# Altium PCB PCB1.PcbDoc
Units mil, origin at the board's own origin, x right, y up, seen from the top; angles counter-clockwise.
Board outline 6624.2 x 3240.03 mil, 2 copper layers (Top Layer, Bottom Layer); 35 components, 65 nets, 242 pads, 0 vias.
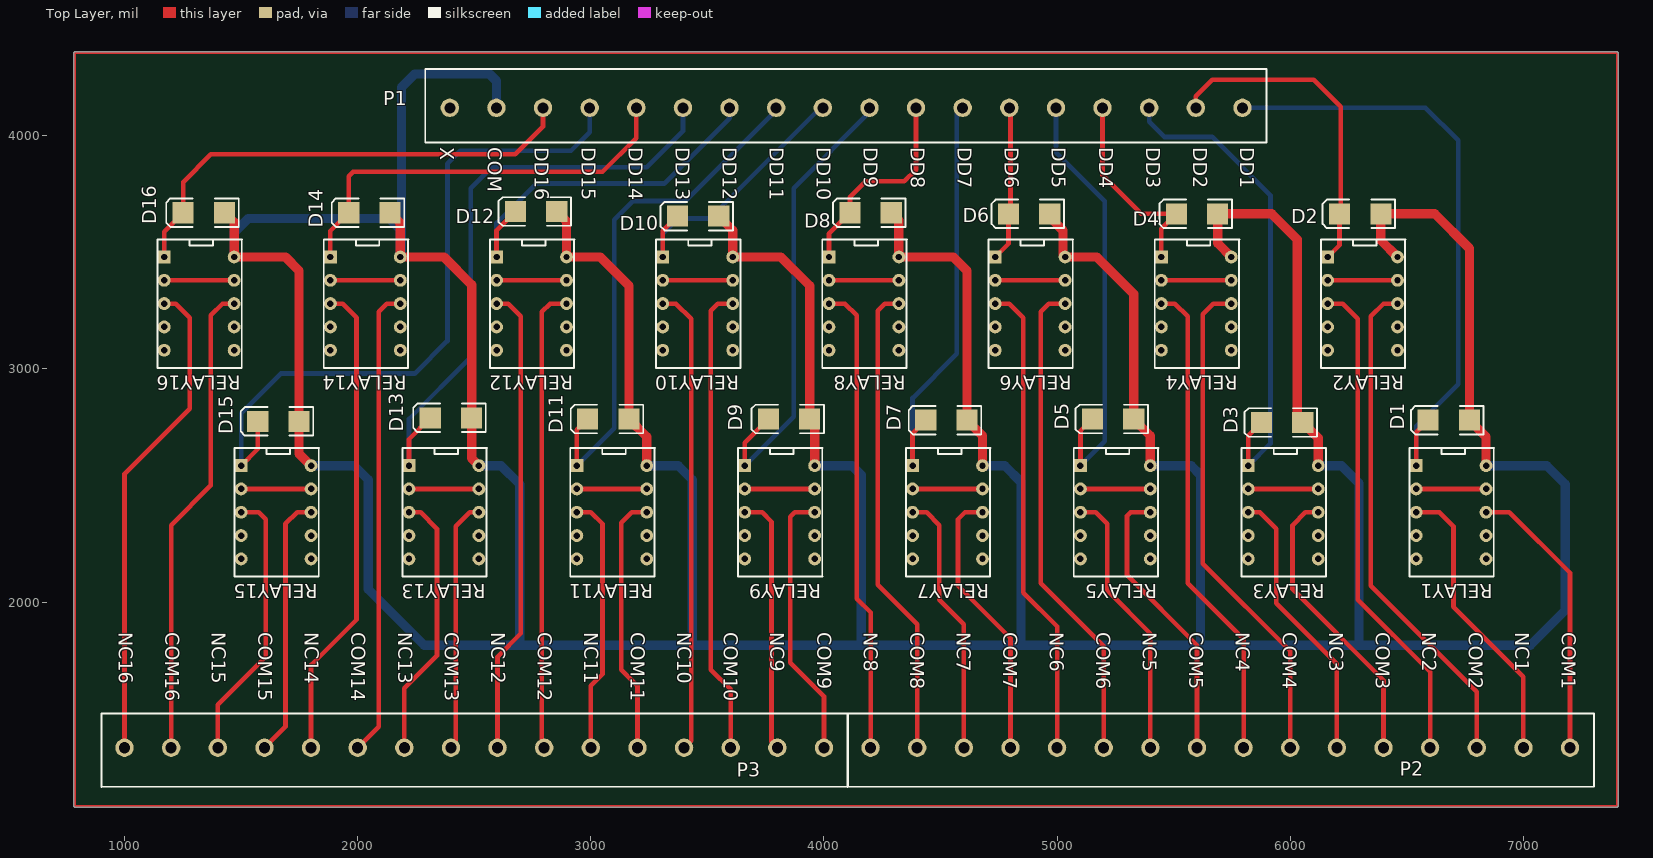
[diagram p0: Top Layer view]
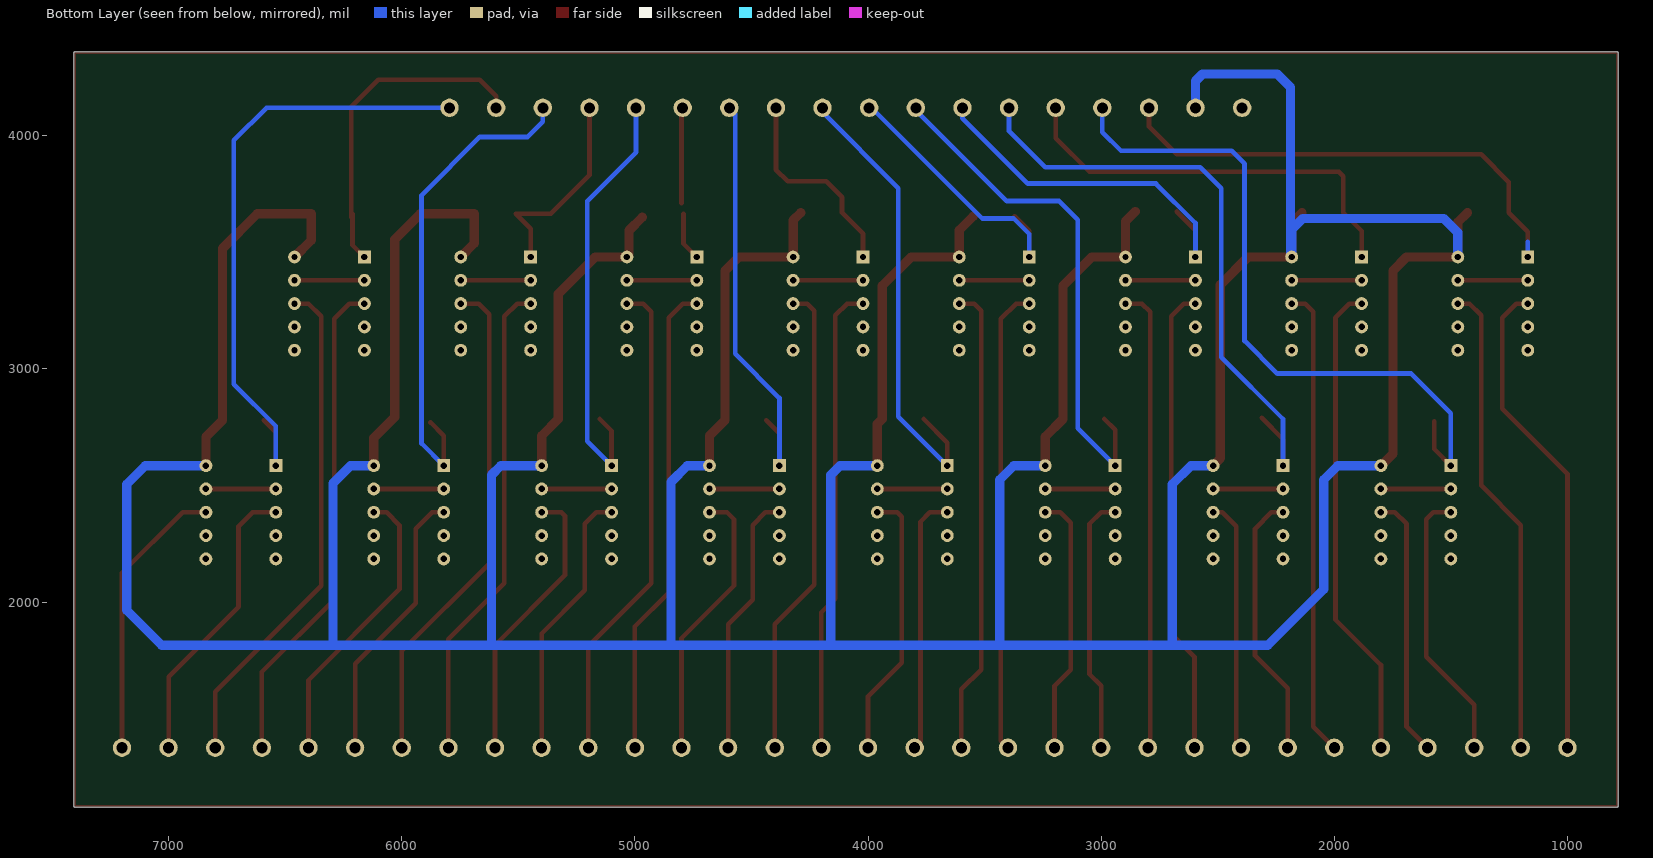
[diagram p1: Bottom Layer view, seen from below]

## Layer stack, top to bottom
Top Solder: solder mask 0.4, Solder Resist, Dk 3.5
Top Layer: signal copper 1.4
Dielectric 1: dielectric 12.6, FR-4, Dk 4.8
Bottom Layer: signal copper 1.4
Bottom Solder: solder mask 0.4, Solder Resist, Dk 3.5

## Board outline
782.39,1125 782.39,4353.35 cw(c787.4,4353.35) 782.46,4354.17 cw(c787.4,4355) 787.4,4360.02 7401.57,4360.02 cw(c7401.57,4355) 7406.59,4355 cw(c7401.57,4355) 7406.52,4354.17 cw(c7401.57,4353.35) 7406.59,4353.35 7406.59,1125 cw(c7401.57,1125) 7401.57,1119.98 787.4,1119.98 cw(c787.4,1125)

## Design rules (kind name [scope] priority, off if disabled: settings)
Clearance [All] p1: gap=20
PolygonConnect [All] p1: connectstyle=Relief reliefconductorwidth=10 reliefentries=4 polygonreliefangle="90 Angle" airgapwidth=10
RoutingVias [All] p1: holewidth=28 width=50 viastyle="Through Hole" minholewidth=28 minwidth=50 maxholewidth=28 maxwidth=50
SolderMaskExpansion [All] p1: expansion=4
Width [All] p1: maxlimit=100 minlimit=10 preferedwidth=20
30 further rules are at their usual default settings.

## Components (designator, comment, footprint, x,y, rotation, side; value= is the part's Value field where it differs from the comment)
D1 "Diode" SMB 6680,2780 r180 top
D2 "Diode" SMB 6300,3665 r180 top
D3 "Diode" SMB 5965,2770 r180 top
D4 "Diode" SMB 5600,3665 r180 top
D5 "Diode" SMB 5240,2785 r180 top
D6 "Diode" SMB 4880,3665 r180 top
D7 "Diode" SMB 4525,2780 r180 top
D8 "Diode" SMB 4200,3670 r180 top
D9 "Diode" SMB 3850,2785 r180 top
D10 "Diode" SMB 3460,3655 r180 top
D11 "Diode" SMB 3075,2785 r180 top
D12 "Diode" SMB 2765,3675 r180 top
D13 "Diode" SMB 2400,2790 r180 top
D14 "Diode" SMB 2050,3670 r180 top
D15 "Diode" SMB 1660,2775 r180 top
D16 "Diode" SMB 1340,3670 r180 top
P1 "Header 18" "CON 18" 2395,4120 r0 top
P2 "Header 16" "CON 16" 7200,1375 r180 top
P3 "Header 16" "CON 16" 4000,1375 r180 top
RELAY1 "OMRON RELAY" G6H-2 6540,2585 r270 top
RELAY2 "OMRON RELAY" G6H-2 6160,3480 r270 top
RELAY3 "OMRON RELAY" G6H-2 5820,2585 r270 top
RELAY4 "OMRON RELAY" G6H-2 5447.14,3480 r270 top
RELAY5 "OMRON RELAY" G6H-2 5100,2585 r270 top
RELAY6 "OMRON RELAY" G6H-2 4734.29,3480 r270 top
RELAY7 "OMRON RELAY" G6H-2 4380,2585 r270 top
RELAY8 "OMRON RELAY" G6H-2 4021.43,3480 r270 top
RELAY9 "OMRON RELAY" G6H-2 3660,2585 r270 top
RELAY10 "OMRON RELAY" G6H-2 3308.57,3480 r270 top
RELAY11 "OMRON RELAY" G6H-2 2940,2585 r270 top
RELAY12 "OMRON RELAY" G6H-2 2595.71,3480 r270 top
RELAY13 "OMRON RELAY" G6H-2 2220,2585 r270 top
RELAY14 "OMRON RELAY" G6H-2 1882.86,3480 r270 top
RELAY15 "OMRON RELAY" G6H-2 1500,2585 r270 top
RELAY16 "OMRON RELAY" G6H-2 1170,3480 r270 top

## Footprints (in the part's own frame and the unit in brackets; to place one, negate y for a bottom-side part, rotate by r counter-clockwise, add the part's x,y. Pads: shape width x height; smd on the part's side, far side on the other; paste and mask are expansions set on the pad)
"CON 16" [mm] "5.08mm"
  round 2 hole 1.2: 1(0,0) 2(5.08,0) 3(10.16,0) 4(15.24,0) 5(20.32,0) 6(25.4,0) 7(30.48,0) 8(35.56,0) 9(40.64,0) 10(45.72,0) 11(50.8,0) 12(55.88,0) 13(60.96,0) 14(66.04,0) 15(71.12,0) 16(76.2,0)
  silkscreen extent -2.6,-3.75 78.7,4.28
"CON 18" [mm] "5.08mm"
  round 2 hole 1.2: 1(0,0) 2(5.08,0) 3(10.16,0) 4(15.24,0) 5(20.32,0) 6(25.4,0) 7(30.48,0) 8(35.56,0) 9(40.64,0) 10(45.72,0) 11(50.8,0) 12(55.88,0) 13(60.96,0) 14(66.04,0) 15(71.12,0) 16(76.2,0) 17(81.28,0) 18(86.36,0)
  silkscreen extent -2.68,-3.77 88.98,4.23
G6H-2 [mm] "OMRON RELAY"
  rect 1.4x1.4 hole 0.7: 1(0,0)
  round 1.4 hole 0.7: 2(2.54,0) 3(5.08,0) 4(7.62,0) 5(10.16,0) 6(10.16,7.62) 7(7.62,7.62) 8(5.08,7.62) 9(2.54,7.62) 10(0,7.62)
  silkscreen extent -1.92,-0.72 12.08,8.5, body extent -1.95,-0.7 12.05,8.43, height 5.4
SMB [mm] "DO-214-AA/SMB; 2 C-Bend Leads; Body 5.3 x 3.6 mm, inc. leads (LxW)"
  rect 2.3x2.3 smd: 1(-2.25,0) 2(2.25,0)
  silkscreen extent -3.8,-1.55 4.1,1.55

## Part data
D1 D2 D3 D4 D5 D6 D7 D8 D9 D10 D11 D12 D13 D14 D15 D16: "Default Diode"
P1: "Header, 18-Pin"
P2 P3: "Header, 16-Pin"
RELAY1 RELAY2 RELAY3 RELAY4 RELAY5 RELAY6 RELAY7 RELAY8 RELAY9 RELAY10 RELAY11 RELAY12 RELAY13 RELAY14 RELAY15 RELAY16: library part "OMRON G6H-2"

## Nets (pads, with @x,y where several pads share a name; then routed paths per layer and width w, separated by ;. In a path a pad name is that pad's centre, name@x,y a point inside that pad or via, vN(x,y) a via of type N, cw(c..) or ccw(c..) an arc to the next point about the centre after c; other vN are vias at no path point)
COM1: P2.1 RELAY1.8 | length 1217.7
  Top Layer w20: RELAY1.8 6940,2385 7200,2125 P2.1
COM2: P2.3 RELAY2.8 | length 2176.2
  Top Layer w20: RELAY2.8 6400,3280 6345,3225 6345,2070 6800,1615 P2.3
COM3: P2.5 RELAY3.8 | length 1249.3
  Top Layer w20: RELAY3.8 6065,2385 6010,2330 6010,2055 6400,1665 P2.5
COM4: P2.7 RELAY4.8 | length 2156.1
  Top Layer w20: RELAY4.8 5670,3280 5625,3235 5625,2165 6000,1790 P2.7
COM5: P2.9 RELAY5.8 | length 1225.5
  Top Layer w20: RELAY5.8 5315,2385 5300,2370 5300,2115 5600,1815 P2.9
COM6: P2.11 RELAY6.8 | length 2100.6
  Top Layer w20: RELAY6.8 4965,3280 4930,3245 4930,2080 5200,1810 P2.11
COM7: P2.13 RELAY7.8 | length 1190.6
  Top Layer w20: RELAY7.8 4605,2385 4575,2355 4575,2070 4800,1845 P2.13
COM8: P2.15 RELAY8.8 | length 2049.3
  Top Layer w20: RELAY8.8 4260,3280 4230,3250 4230,2075 4400,1905 P2.15
COM9: P3.1 RELAY9.8 | length 1163.3
  Top Layer w20: RELAY9.8 3875,2385 3855,2365 3855,1740 4000,1595 P3.1
COM10: P3.3 RELAY10.8 | length 2016.2
  Top Layer w20: P3.3 3600,1625 3515,1710 3515,3250 3545,3280 RELAY10.8
COM11: P3.5 RELAY11.8 | length 1122.6
  Top Layer w20: P3.5 3200,1640 3130,1710 3130,2340 3175,2385 RELAY11.8
COM12: P3.7 RELAY12.8 | length 1994.4
  Top Layer w20: P3.7 2790,1385 2790,3245 2825,3280 RELAY12.8
COM13: P3.9 RELAY13.8 | length 1083.1
  Top Layer w20: P3.9 2420,1395 2420,2325 2480,2385 RELAY13.8
COM14: P3.11 RELAY14.8 | length 2014.6
  Top Layer w20: P3.11 2090,1465 2090,3245 2125,3280 RELAY14.8
COM15: P3.13 RELAY15.8 | length 1128
  Top Layer w20: P3.13 1690,1465 1690,2335 1740,2385 RELAY15.8
COM16: P3.15 RELAY16.8 | length 2046.1
  Top Layer w20: P3.15 1200,2330 1370,2500 1370,3230 1420,3280 RELAY16.8
DD1: D1.2 P1.18 RELAY1.1 | length 2668.8
  Top Layer w20: RELAY1.1 6540,2728.58 D1.2
  Bottom Layer w20: P1.18 6580,4120 6720,3980 6720,2935 6540,2755 RELAY1.1
DD2: D2.2 P1.17 RELAY2.1 | length 1428.5
  Top Layer w20: P1.17 5595,4170 5665,4240 6100,4240 6216.42,4123.58 D2.2@6216.42,3650 ; RELAY2.1 6211.42,3531.42 D2.2
DD3: D3.2 P1.16 RELAY3.1 | length 2118.2
  Top Layer w20: RELAY3.1 5820,2713.58 D3.2
  Bottom Layer w20: P1.16 5395,4060 5460,3995 5665,3995 5915,3745 5915,2680 RELAY3.1
DD4: D4.2 P1.15 RELAY4.1 | length 986.4
  Top Layer w20: 5195,4005 P1.15 ; P1.15@5195,4105 5195,3830 5360,3665 D4.2 5447.14,3600.73 RELAY4.1
DD5: D5.2 P1.14 RELAY5.1 | length 1886.8
  Top Layer w20: RELAY5.1 5100,2733.58 D5.2
  Bottom Layer w20: P1.14 4995,3930 5205,3720 5205,2690 RELAY5.1
DD6: D6.2 P1.13 RELAY6.1 | length 620
  Top Layer w20: RELAY6.1 4791.42,3537.13 D6.2 ; P1.13 4800,4115 4800,3710.71
DD7: D7.2 P1.12 RELAY7.1 | length 1842.4
  Top Layer w20: RELAY7.1 4380,2723.58 D7.2
  Bottom Layer w20: RELAY7.1 4380,2875 4570,3065 4570,4095 P1.12
DD8: D8.2 P1.11 RELAY8.1 | length 891.4
  Top Layer w20: RELAY8.1 4021.43,3580.01 D8.2 4111.42,3736.42 4180,3805 4345,3805 4395,3855 P1.11
DD9: D9.2 P1.10 RELAY9.1 | length 1998.6
  Top Layer w20: RELAY9.1 3660,2683.58 D9.2
  Bottom Layer w20: RELAY9.1 3870,2795 3870,3775 4195,4100 P1.10
DD10: D10.2 P1.9 RELAY10.1 | length 1210.3
  Top Layer w20: RELAY10.1 3308.57,3592.15 D10.2
  Bottom Layer w20: RELAY10.1 3308.57,3578.57 3375,3645 3510,3645 3985,4120 P1.9
DD11: D11.2 P1.8 RELAY11.1 | length 2240.2
  Top Layer w20: RELAY11.1 2940,2738.58 D11.2
  Bottom Layer w20: RELAY11.1 3100,2745 3100,3640 3180,3720 3405,3720 3795,4110 P1.8
DD12: D12.2 P1.7 RELAY12.1 | length 1604.5
  Top Layer w20: RELAY12.1 2595.71,3594.3 D12.2
  Bottom Layer w20: RELAY12.1 2595.71,3625.71 2765,3795 3315,3795 3595,4075 P1.7
DD13: D13.2 P1.6 RELAY13.1 | length 2654.1
  Top Layer w20: RELAY13.1 2220,2698.58 D13.2
  Bottom Layer w20: RELAY13.1 2220,2785 2485,3050 2485,3775 2575,3865 3240,3865 3395,4020 P1.6
DD14: D14.2 P1.5 RELAY14.1 | length 1810.3
  Top Layer w20: RELAY14.1 1882.86,3591.44 D14.2 1961.42,3826.42 1980,3845 3050,3845 3195,3990 P1.5
DD15: D15.2 P1.4 RELAY15.1 | length 2988.9
  Top Layer w20: RELAY15.1 1571.42,2656.42 D15.2
  Bottom Layer w20: RELAY15.1 1500,2810 1670,2980 2245,2980 2385,3120 2385,3880 2440,3935 2915,3935 2995,4015 P1.4
DD16: D16.2 P1.3 RELAY16.1 | length 2142.5
  Top Layer w20: RELAY16.1 1170,3588.58 D16.2 1251.42,3801.42 1370,3920 2675,3920 2795,4040 P1.3
  Bottom Layer w20: RELAY16.1 1170,3545
GND: D1.1 D2.1 D3.1 D4.1 D5.1 D6.1 D7.1 D8.1 D9.1 D10.1 D11.1 D12.1 D13.1 D14.1 D15.1 D16.1 P1.2 RELAY1.10 RELAY2.10 RELAY3.10 RELAY4.10 RELAY5.10 RELAY6.10 RELAY7.10 RELAY8.10 RELAY9.10 RELAY10.10 RELAY11.10 RELAY12.10 RELAY13.10 RELAY14.10 RELAY15.10 RELAY16.10 | length 26085.5
  Top Layer w40: D16.1 1470,3628.58 RELAY16.10 1690,3480 1748.58,3421.42 D15.1 1748.58,2636.42 RELAY15.10 ; D14.1 2182.86,3625.73 RELAY14.10 2370,3480 2488.58,3361.42 D13.1 2488.58,2616.42 RELAY13.10 ; D12.1 2895.71,3632.87 RELAY12.10 3040,3480 3163.58,3356.42 D11.1 3240,2708.58 RELAY11.10 ; D10.1 3608.57,3595.01 RELAY10.10 3815,3480 3938.58,3356.42 D9.1 3960,2763.58 RELAY9.10 ; D8.1 4321.43,3637.15 RELAY8.10 4555,3480 4613.58,3421.42 D7.1 4680,2713.58 RELAY7.10 ; D6.1@4968.58,3650 5025,3593.58 5025,3489.29 RELAY6.10 5170,3480 5328.58,3321.42 D5.1 5400,2713.58 RELAY5.10 ; RELAY4.10 5688.58,3538.56 D4.1 5920,3665 6025,3560 ; 6030,3555 6030,2793.58 D3.1 6120,2703.58 RELAY3.10 ; RELAY2.10 6388.58,3551.42 D2.1 6620,3665 6768.58,3516.42 D1.1 6840,2708.58 RELAY1.10
  Bottom Layer w40: RELAY16.10 1470,3585 1530,3645 2135,3645 2182.86,3597.14 RELAY14.10 2187.86,3485 2187.86,4207.86 2245,4265 2565,4265 2595,4235 P1.2 ; RELAY15.10 1985,2585 2045,2525 2045,2055 2285,1815 2695,1815 ; RELAY13.10 2615,2585 2695,2505 2695,1815 ; RELAY11.10 3375,2585 3435,2525 3435,1815 ; RELAY9.10 4120,2585 4160,2545 4160,1815 ; RELAY7.10 4775,2585 4845,2515 4845,1815 ; RELAY5.10 5575,2585 5615,2545 5615,1815 ; RELAY3.10 6220,2585 6295,2510 6295,1815 ; RELAY1.10 7100,2585 7180,2505 7180,1965 7030,1815 6295,1815 ; 2695,1815 3435,1815 ; 3435,1815 4160,1815 ; 4160,1815 4845,1815 ; 4845,1815 5615,1815 ; 5615,1815 6295,1815
NC1: P2.2 RELAY1.3 | length 1259.1
  Top Layer w20: RELAY1.3 6640,2385 6700,2325 6700,1980 7000,1680 P2.2
NC2: P2.4 RELAY2.3 | length 2125.3
  Top Layer w20: RELAY2.3 6225,3280 6290,3215 6290,2010 6600,1700 P2.4
NC3: P2.6 RELAY3.3 | length 1196.7
  Top Layer w20: RELAY3.3 5870,2385 5940,2315 5940,1995 6200,1735 P2.6
NC4: P2.8 RELAY4.3 | length 2085.1
  Top Layer w20: RELAY4.3 5505,3280 5560,3225 5560,2080 5800,1840 P2.8
NC5: P2.10 RELAY5.3 | length 1172.3
  Top Layer w20: RELAY5.3 5165,2385 5215,2335 5215,2050 5400,1865 P2.10
NC6: P2.12 RELAY6.3 | length 2050.6
  Top Layer w20: RELAY6.3 4795,3280 4855,3220 4855,2040 5000,1895 P2.12
NC7: P2.14 RELAY7.3 | length 1136.3
  Top Layer w20: RELAY7.3 4440,2385 4495,2330 4495,2010 4600,1905 P2.14
NC8: P2.16 RELAY8.3 | length 2019.1
  Top Layer w20: RELAY8.3 4090,3280 4140,3230 4140,2015 4200,1955 P2.16
NC9: P3.2 RELAY9.3 | length 1111.9
  Top Layer w20: RELAY9.3 3735,2385 3775,2345 3775,1400 P3.2
NC10: P3.4 RELAY10.3 | length 2000.8
  Top Layer w20: RELAY10.3 3365,3280 3430,3215 3430,1405 P3.4
NC11: P3.6 RELAY11.3 | length 1111.4
  Top Layer w20: RELAY11.3 3000,2385 3050,2335 3050,1690 3000,1640 P3.6
NC12: P3.8 RELAY12.3 | length 2018.5
  Top Layer w20: RELAY12.3 2645,3280 2700,3225 2700,1865 2600,1765 P3.8
NC13: P3.10 RELAY13.3 | length 1147
  Top Layer w20: P3.10 2200,1630 2340,1770 2340,2315 2270,2385 RELAY13.3
NC14: P3.12 RELAY14.3 | length 2062.8
  Top Layer w20: P3.12 1800,1730 1995,1925 1995,3220 1935,3280 RELAY14.3
NC15: P3.14 RELAY15.3 | length 1182.3
  Top Layer w20: P3.14 1400,1560 1605,1765 1605,2355 1575,2385 RELAY15.3
NC16: P3.16 RELAY16.3 | length 2095.8
  Top Layer w20: P3.16 1000,2550 1280,2830 1280,3220 1220,3280 RELAY16.3
NetRELAY1_2: RELAY1.2 RELAY1.9 | length 300
  Top Layer w20: RELAY1.2 RELAY1.9
NetRELAY2_2: RELAY2.2 RELAY2.9 | length 300
  Top Layer w20: RELAY2.2 RELAY2.9
NetRELAY3_2: RELAY3.2 RELAY3.9 | length 300
  Top Layer w20: RELAY3.2 RELAY3.9
NetRELAY4_2: RELAY4.2 RELAY4.9 | length 300
  Top Layer w20: RELAY4.2 RELAY4.9
NetRELAY5_2: RELAY5.2 RELAY5.9 | length 300
  Top Layer w20: RELAY5.2 RELAY5.9
NetRELAY6_2: RELAY6.2 RELAY6.9 | length 300
  Top Layer w20: RELAY6.2 RELAY6.9
NetRELAY7_2: RELAY7.2 RELAY7.9 | length 300
  Top Layer w20: RELAY7.2 RELAY7.9
NetRELAY8_2: RELAY8.2 RELAY8.9 | length 300
  Top Layer w20: RELAY8.2 RELAY8.9
NetRELAY9_2: RELAY9.2 RELAY9.9 | length 300
  Top Layer w20: RELAY9.2 RELAY9.9
NetRELAY10_2: RELAY10.2 RELAY10.9 | length 300
  Top Layer w20: RELAY10.2 RELAY10.9
NetRELAY11_2: RELAY11.2 RELAY11.9 | length 300
  Top Layer w20: RELAY11.2 RELAY11.9
NetRELAY12_2: RELAY12.2 RELAY12.9 | length 300
  Top Layer w20: RELAY12.2 RELAY12.9
NetRELAY13_2: RELAY13.2 RELAY13.9 | length 300
  Top Layer w20: RELAY13.2 RELAY13.9
NetRELAY14_2: RELAY14.2 RELAY14.9 | length 300
  Top Layer w20: RELAY14.2 RELAY14.9
NetRELAY15_2: RELAY15.2 RELAY15.9 | length 300
  Top Layer w20: RELAY15.2 RELAY15.9
NetRELAY16_2: RELAY16.2 RELAY16.9 | length 300
  Top Layer w20: RELAY16.2 RELAY16.9
pads on no net: P1.1 RELAY1.4 RELAY1.5 RELAY1.6 RELAY1.7 RELAY2.4 RELAY2.5 RELAY2.6 RELAY2.7 RELAY3.4 RELAY3.5 RELAY3.6 RELAY3.7 RELAY4.4 RELAY4.5 RELAY4.6 RELAY4.7 RELAY5.4 RELAY5.5 RELAY5.6 RELAY5.7 RELAY6.4 RELAY6.5 RELAY6.6 RELAY6.7 RELAY7.4 RELAY7.5 RELAY7.6 RELAY7.7 RELAY8.4 RELAY8.5 RELAY8.6 RELAY8.7 RELAY9.4 RELAY9.5 RELAY9.6 RELAY9.7 RELAY10.4 RELAY10.5 RELAY10.6 RELAY10.7 RELAY11.4 RELAY11.5 RELAY11.6 RELAY11.7 RELAY12.4 RELAY12.5 RELAY12.6 RELAY12.7 RELAY13.4 RELAY13.5 RELAY13.6 RELAY13.7 RELAY14.4 RELAY14.5 RELAY14.6 RELAY14.7 RELAY15.4 RELAY15.5 RELAY15.6 RELAY15.7 RELAY16.4 RELAY16.5 RELAY16.6 RELAY16.7
copper on no net: | length 19685
  Top Layer w10: 787.4,4353.35 787.4,1125 7401.57,1125 7401.57,4353.35 ; 787.4,4355 7401.57,4355

## Silkscreen, mask and mechanical layers (free items; w line width, h text height)
Top Overlay:
  text "X" at 2355,3950 h60 r270
  text "COM" at 2556.76,3950 h60 r270
  text "DD16" at 2758.53,3950 h60 r270
  text "DD15" at 2960.29,3950 h60 r270
  text "DD14" at 3162.06,3950 h60 r270
  text "DD13" at 3363.82,3950 h60 r270
  text "DD12" at 3565.59,3950 h60 r270
  text "DD11" at 3767.35,3950 h60 r270
  text "DD10" at 3969.12,3950 h60 r270
  text "DD9" at 4170.88,3950 h60 r270
  text "DD8" at 4372.65,3950 h60 r270
  text "DD7" at 4574.41,3950 h60 r270
  text "DD6" at 4776.18,3950 h60 r270
  text "DD5" at 4977.94,3950 h60 r270
  text "DD4" at 5179.71,3950 h60 r270
  text "DD3" at 5381.47,3950 h60 r270
  text "DD2" at 5583.24,3950 h60 r270
  text "DD1" at 5785,3950 h60 r270
  text "NC16" at 975,1870 h60 r270
  text "COM16" at 1174.68,1870 h60 r270
  text "NC15" at 1374.35,1870 h60 r270
  text "COM15" at 1574.03,1870 h60 r270
  text "NC14" at 1773.71,1870 h60 r270
  text "COM14" at 1973.39,1870 h60 r270
  text "NC13" at 2173.06,1870 h60 r270
  text "COM13" at 2372.74,1870 h60 r270
  text "NC12" at 2572.42,1870 h60 r270
  text "COM12" at 2772.1,1870 h60 r270
  text "NC11" at 2971.77,1870 h60 r270
  text "COM11" at 3171.45,1870 h60 r270
  text "NC10" at 3371.13,1870 h60 r270
  text "COM10" at 3570.81,1870 h60 r270
  text "NC9" at 3770.48,1870 h60 r270
  text "COM9" at 3970.16,1870 h60 r270
  text "NC8" at 4169.84,1870 h60 r270
  text "COM8" at 4369.52,1870 h60 r270
  text "NC7" at 4569.19,1870 h60 r270
  text "COM7" at 4768.87,1870 h60 r270
  text "NC6" at 4968.55,1870 h60 r270
  text "COM6" at 5168.23,1870 h60 r270
  text "NC5" at 5367.9,1870 h60 r270
  text "COM5" at 5567.58,1870 h60 r270
  text "NC4" at 5767.26,1870 h60 r270
  text "COM4" at 5966.94,1870 h60 r270
  text "NC3" at 6166.61,1870 h60 r270
  text "COM3" at 6366.29,1870 h60 r270
  text "NC2" at 6565.97,1870 h60 r270
  text "COM2" at 6765.64,1870 h60 r270
  text "NC1" at 6965.32,1870 h60 r270
  text "COM1" at 7165,1870 h60 r270